# Altium PCB DORY.PcbDoc (part 1 of 2)
Units mil, origin at the board's own origin, x right, y up, seen from the top; angles counter-clockwise.
Board outline 4500 x 4000 mil, 4 copper layers (Signal Layer 1, Signal Layer 2, Signal Layer 3, Signal Layer 4), stack 59.904 mil thick; 158 components, 96 nets, 587 pads, 62 vias.
Unrouted connection lines stored in the file: 389.
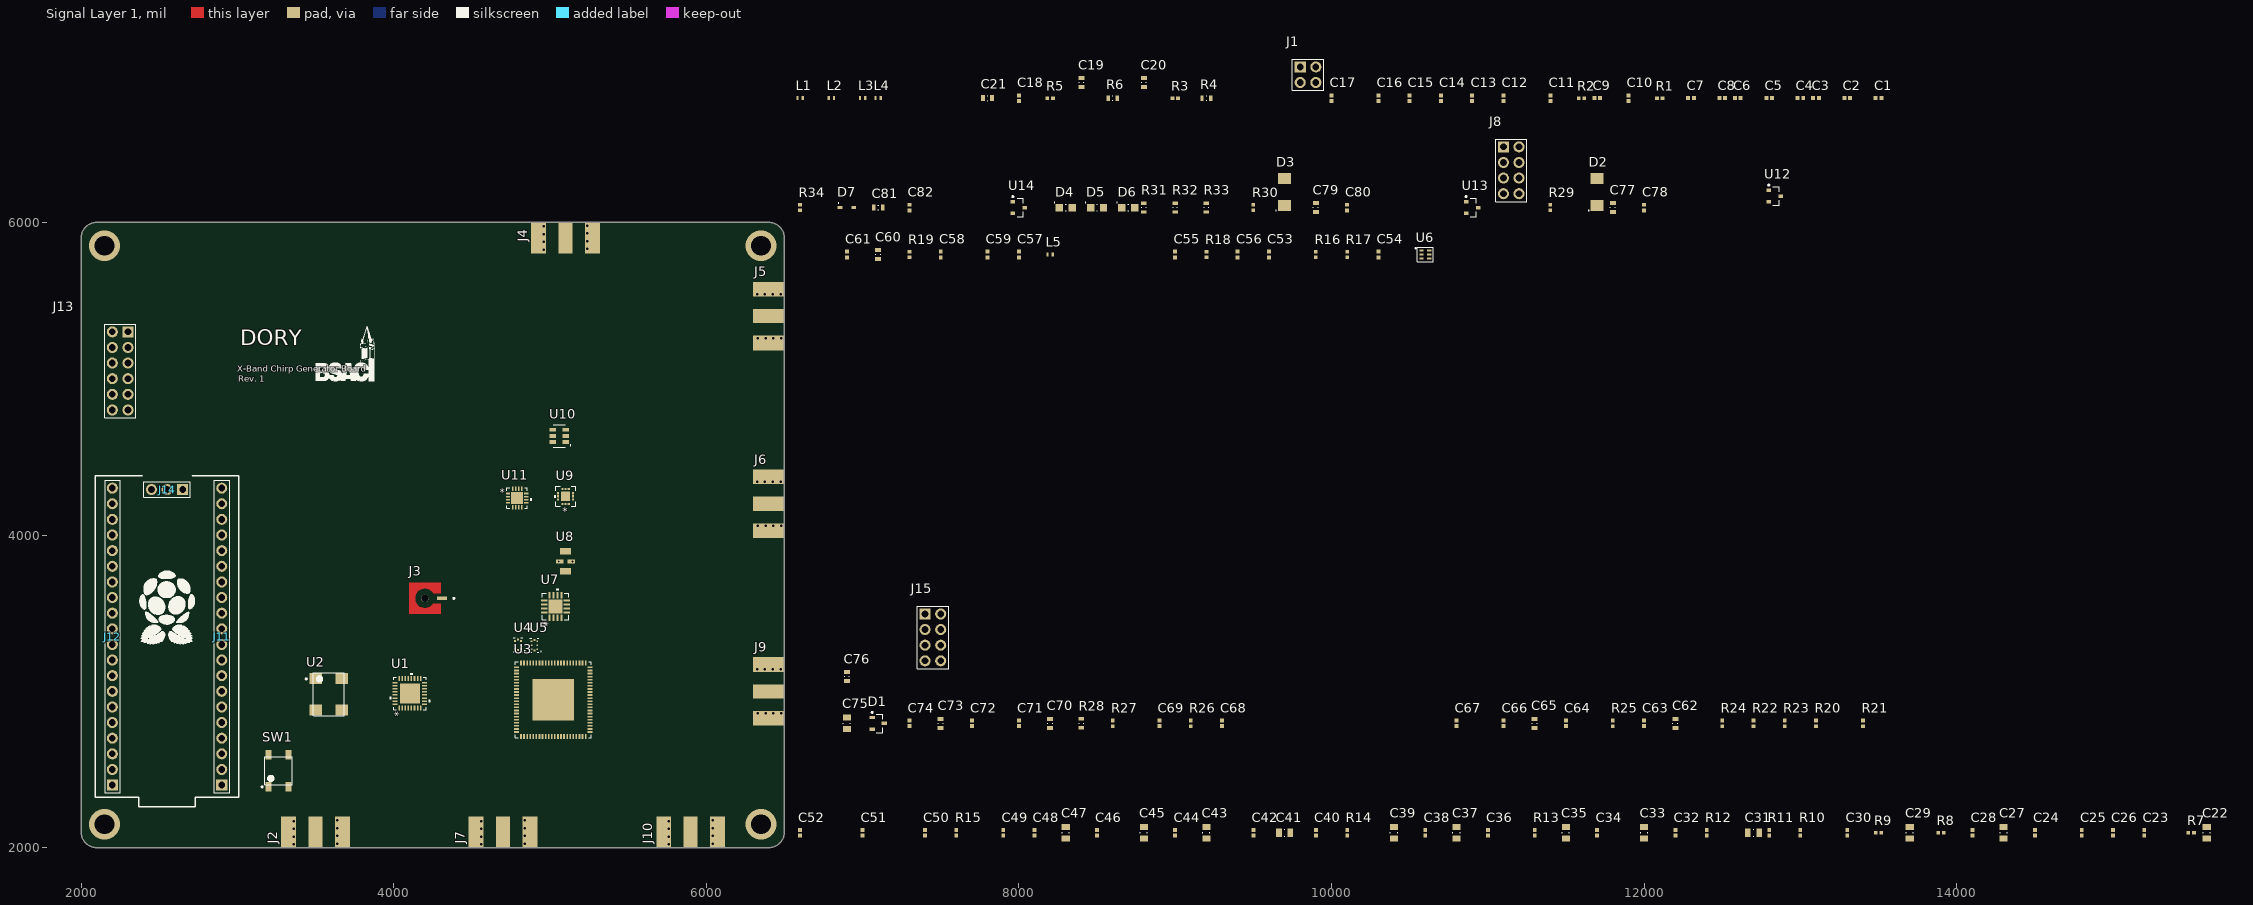
[diagram p0: Signal Layer 1 view]
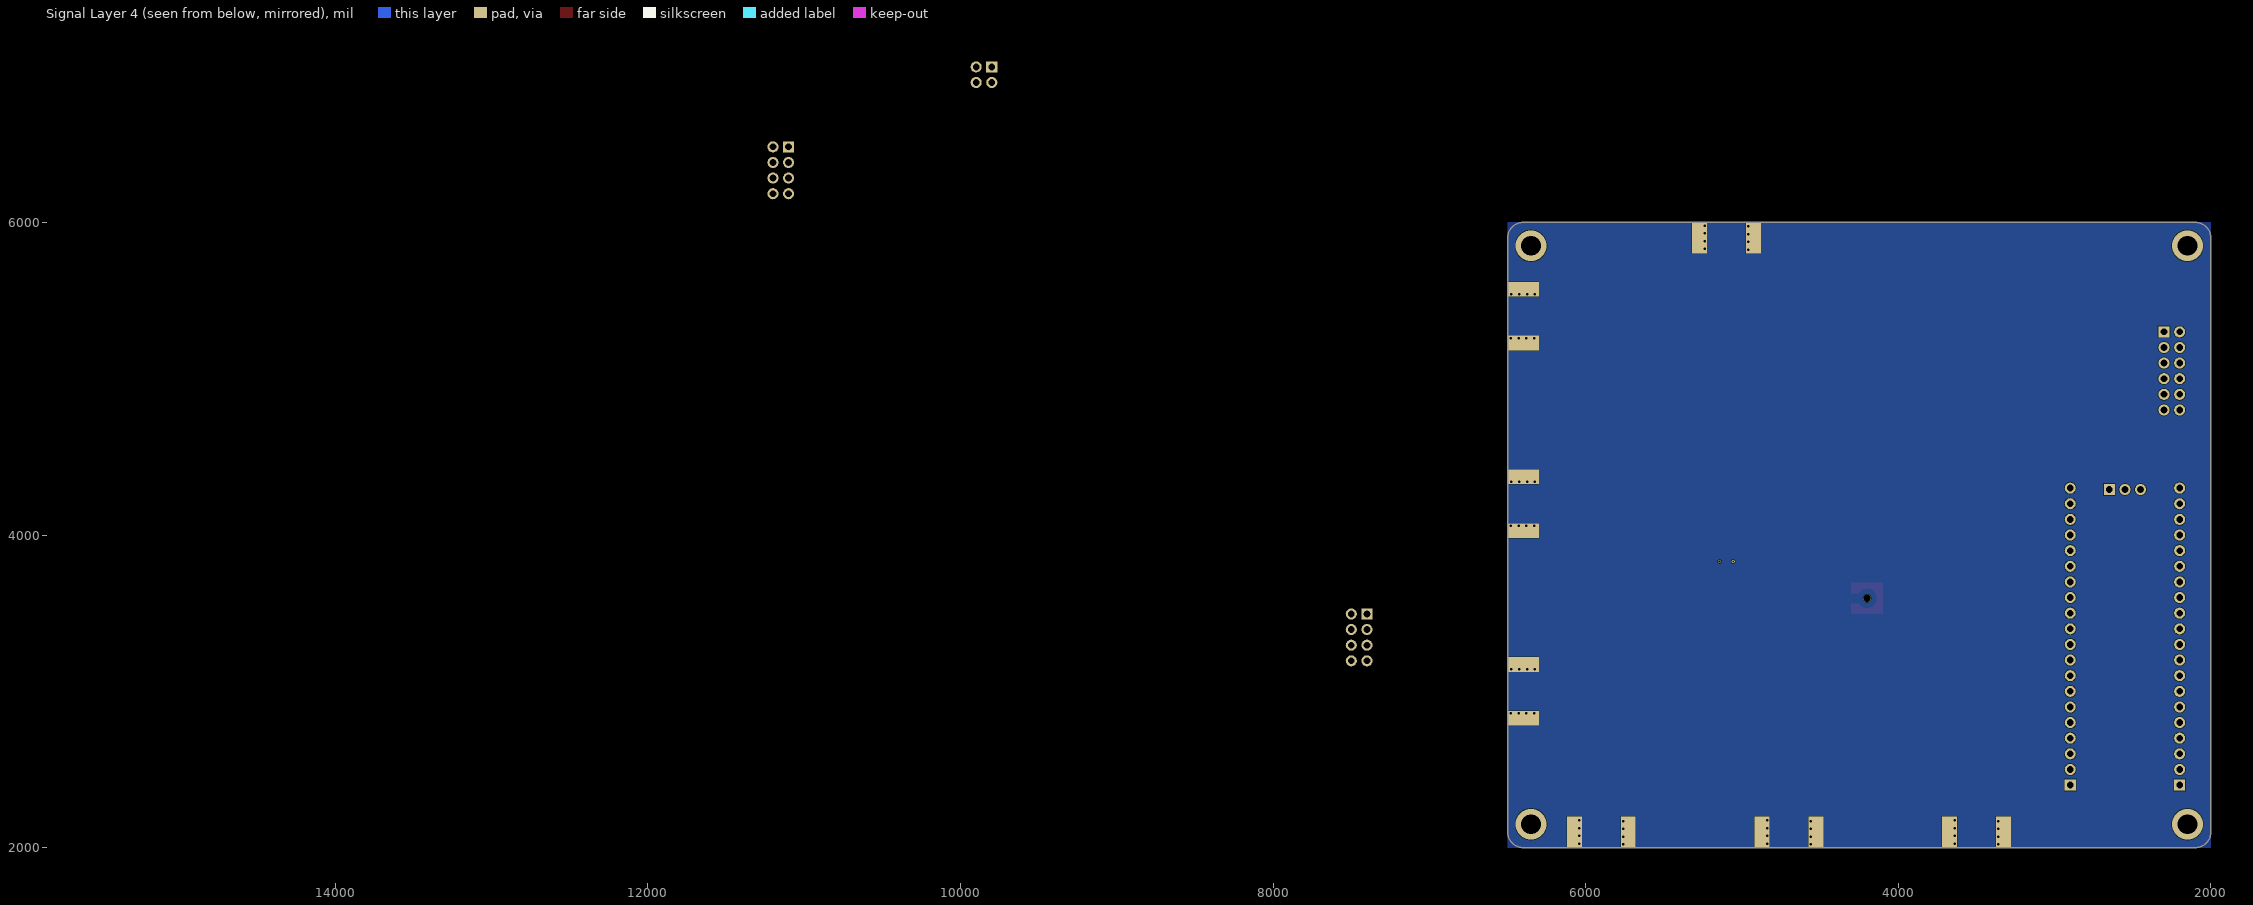
[diagram p1: Signal Layer 4 view, seen from below]
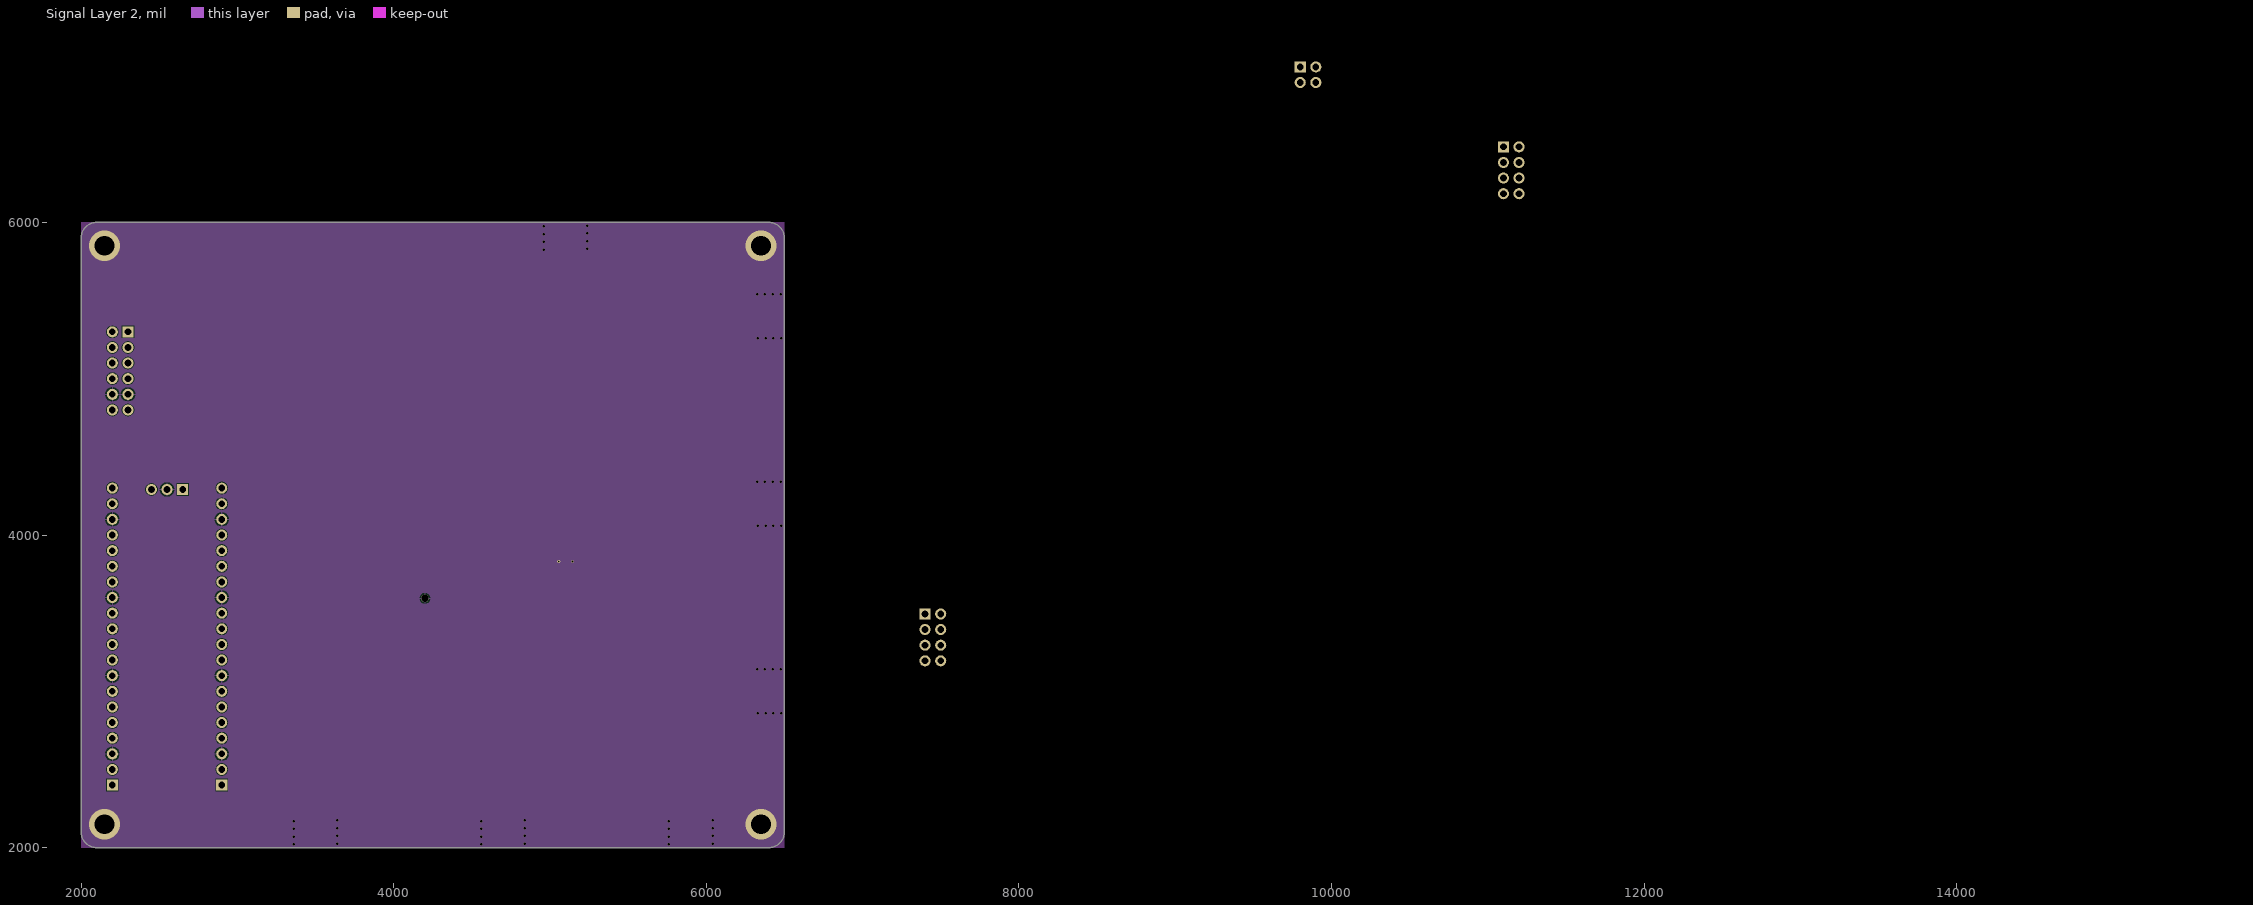
[diagram p2: Signal Layer 2]

## Layer stack, top to bottom
Top Solder: solder mask 0.5, Solder Resist, Dk 3.5
Signal Layer 1: signal copper 1.378
Core 1: core 10, Rogers 4350B 0.010 H1xHH CM 24x18, Dk 3.48
Signal Layer 2: signal copper 1.378
Prepreg 1: prepreg 6.696, Isola FR370HR 1080 18x24 RC71, Dk 3.63
Core 2: core 21, Isola FR370HR 0.021 HHxHH CM 18x24, Dk 4.24
Prepreg 2: prepreg 6.696, Isola FR370HR 1080 18x24 RC71, Dk 3.63
Signal Layer 3: signal copper 1.378
Core 3: core 10, Isola FR370HR 0.010 H1xHH CM 18x24, Dk 4.21
Signal Layer 4: signal copper 1.378
Bottom Solder: solder mask 0.5, Solder Resist, Dk 3.5

## Board outline
2000,2100 2000,5900 cw(c2100,5900) 2100,6000 6400,6000 cw(c6400,5900) 6500,5900 6500,2100 cw(c6400,2100) 6400,2000 2100,2000 cw(c2100,2100)

## Design rules (kind name [scope] priority, off if disabled: settings)
Clearance [All] p1: gap=4 ignorepadtopadclearanceinfootprint=FALSE
DiffPairsRouting [All] p1: maxlimit=10 minlimit=6 mostfreqgap=6 toplayer_minwidth=4 toplayer_maxwidth=50 toplayer_prefwidth=10 midlayer1_minwidth=4 midlayer1_maxwidth=50 midlayer1_prefwidth=10 midlayer2_minwidth=4 midlayer2_maxwidth=50 midlayer2_prefwidth=10 bottomlayer_minwidth=4 bottomlayer_maxwidth=50 bottomlayer_prefwidth=10 maxuncoupledlength=500
HoleSize [All] p1: absolutevalues=TRUE maxlimit=200 minlimit=4 maxpercent=80.000 minpercent=20.000
PolygonConnect [All] p1: thpad.connectstyle=Relief thpad.reliefconductorwidth=10 thpad.reliefentries=4 thpad.polygonreliefangle="90 Angle" thpad.airgapwidth=10 smdpad.connectstyle=Direct smdpad.reliefconductorwidth=10 smdpad.reliefentries=4 smdpad.polygonreliefangle="90 Angle" smdpad.airgapwidth=10 via.connectstyle=Direct via.reliefconductorwidth=10 via.reliefentries=4 via.polygonreliefangle="90 Angle" via.airgapwidth=10
RoutingVias [All] p1: holewidth=15 width=25 viastyle="Through Hole" minholewidth=6 minwidth=11 maxholewidth=28 maxwidth=50
SolderMaskExpansion [All] p1: expansion=4 istentingtop=FALSE
SupplyNets "Schematic Supply Nets_7" [InNet('3V3')] p1: voltage=0.000
SupplyNets "Schematic Supply Nets_6" [InNet('5V')] p2: voltage=0.000
SupplyNets "Schematic Supply Nets_5" [InNet('1V8')] p3: voltage=0.000
SupplyNets "Schematic Supply Nets" [InNet('GND')] p4: voltage=0.000
Width "50 Ohms" [InNetClass('50 Ω')] p1: maxlimit=16.65 minlimit=10 preferedwidth=10 toplayer_minwidth=16.65 toplayer_prefwidth=16.65 minimp=50.000000 maximp=50.000000 favimp=50.000000
Width [All] p2: maxlimit=50 minlimit=4 preferedwidth=10 minimp=50.000000 maximp=50.000000 favimp=50.000000
28 further rules are at their usual default settings.

## Classes and differential pairs
net class "50 Ω": LO_3 NetC54_1 NetJ2_1 NetJ3_1 NetJ4_1 NetJ5_1 NetJ6_1 NetR16_1 NetR16_2 NetR20_1 NetR20_2 NetR21_2 NetR22_2 NetR23_2 RF_3 VCO_REFIN_1
component class VCO: C1 C2 C3 C4 C5 C6 C7 C8 C9 C10 C11 C12 C13 C14 C15 C16 C17 C18 C19 C20 C21 J1 J2 L1 L2 L3 L4 R1 R2 R3 R4 R5 R6 U1 U2
component class POWER: C77 C78 C79 C80 C81 C82 D2 D3 D4 D5 D6 D7 J7 J8 J9 J10 R29 R30 R31 R32 R33 R34 U12 U13 U14
component class MIXER: C53 C54 C55 C56 C57 C58 C59 C60 C61 J3 L5 R16 R17 R18 R19 U6 U7 U8
component class MCU: J11 J12 J13 J14 J15 SW1
component class DOUBLER: C62 C63 C64 C65 C66 C67 C68 C69 C70 C71 C72 C73 C74 C75 C76 D1 J4 J5 J6 R20 R21 R22 R23 R24 R25 R26 R27 R28 U9 U10 U11
component class DDS: C22 C23 C24 C25 C26 C27 C28 C29 C30 C31 C32 C33 C34 C35 C36 C37 C38 C39 C40 C41 C42 C43 C44 C45 C46 C47 C48 C49 C50 C51 C52 R7 R8 R9 R10 R11 R12 R13 R14 R15 U3 U4 U5
differential pair VCO_RFOUTB: +VCO_RFOUTB_P -VCO_RFOUTB_N
differential pair VCO_RFOUTA: +VCO_RFOUTA_P -VCO_RFOUTA_N
differential pair DDS_REFCLK_2: +DDS_REFCLK_2_P -DDS_REFCLK_2_N
differential pair DDS_OUT: +DDS_OUT_P -DDS_OUT_N
differential pair DDS_AOUT_2: +DDS_AOUT_2_P -DDS_AOUT_2_N

## Components (designator, comment, footprint, x,y, rotation, side; value= is the part's Value field where it differs from the comment)
C1 "100 nF" CAP_0402 13500,6795 r0 top
C2 "10 pF" CAP_0402 13300,6795 r0 top
C3 "100 nF" CAP_0402 13100,6795 r0 top
C4 "10 pF" CAP_0402 13000,6795 r0 top
C5 "100 nF" CAP_0402 12800,6795 r0 top
C6 "10 pF" CAP_0402 12600,6795 r0 top
C7 "1 nF" CAP_0402 12300,6795 r0 top
C8 "100 nF" CAP_0402 12500,6795 r0 top
C9 "10 pF" CAP_0402 11700,6795 r0 top
C10 "100 nF" CAP_0402 11900,6795 r90 top
C11 "10 pF" CAP_0402 11400,6795 r90 top
C12 "100 nF" CAP_0402 11100,6795 r90 top
C13 "10 pF" CAP_0402 10900,6795 r90 top
C14 "100 nF" CAP_0402 10700,6795 r90 top
C15 "10 pF" CAP_0402 10500,6795 r90 top
C16 "100 nF" CAP_0402 10300,6795 r90 top
C17 "10 pF" CAP_0402 10000,6795 r90 top
C18 "100 nF" CAP_0402 8000,6795 r90 top
C19 "3.01 nF" CAP_0603 8400,6895 r90 top
C20 "218 pF" CAP_0603 8800,6895 r90 top
C21 "133 nF" CAP_0603 7800,6795 r0 top
C22 "10 uF" CAP_0805 15600,2095 r90 top
C23 "100 nF" CAP_0402 15200,2095 r90 top
C24 "100 nF" CAP_0402 14500,2095 r90 top
C25 "1 uF" CAP_0402 14800,2095 r90 top
C26 "1 uF" CAP_0402 15000,2095 r90 top
C27 "10 uF" CAP_0805 14300,2095 r90 top
C28 "100 nF" CAP_0402 14100,2095 r90 top
C29 "10 uF" CAP_0805 13700,2095 r90 top
C30 "100 nF" CAP_0402 13300,2095 r90 top
C31 "10 uF" CAP_0805 12700,2095 r0 top
C32 "100 nF" CAP_0402 12200,2095 r90 top
C33 "10 uF" CAP_0805 12000,2095 r90 top
C34 "100 nF" CAP_0402 11700,2095 r90 top
C35 "10 uF" CAP_0805 11500,2095 r90 top
C36 "100 nF" CAP_0402 11000,2095 r90 top
C37 "10 uF" CAP_0805 10800,2095 r90 top
C38 "100 nF" CAP_0402 10600,2095 r90 top
C39 "10 uF" CAP_0805 10400,2095 r90 top
C40 "100 nF" CAP_0402 9900,2095 r90 top
C41 "10 uF" CAP_0805 9700,2095 r0 top
C42 "100 nF" CAP_0402 9500,2095 r90 top
C43 "10 uF" CAP_0805 9200,2095 r90 top
C44 "100 nF" CAP_0402 9000,2095 r90 top
C45 "10 uF" CAP_0805 8800,2095 r90 top
C46 "100 nF" CAP_0402 8500,2095 r90 top
C47 "10 uF" CAP_0805 8300,2095 r90 top
C48 "100 nF" CAP_0402 8100,2095 r90 top
C49 "1 nF" CAP_0402 7900,2095 r90 top
C50 "1 nF" CAP_0402 7400,2095 r90 top
C51 "1 nF" CAP_0402 7000,2095 r90 top
C52 "1 nF" CAP_0402 6600,2095 r90 top
C53 "1 nF" CAP_0402 9600,5795 r90 top
C54 "100 pF" CAP_0402 10300,5795 r90 top
C55 "1 nF" CAP_0402 9000,5795 r90 top
C56 "0.3 pF" CAP_0402 9400,5795 r90 top
C57 "1 nF" CAP_0402 8000,5795 r90 top
C58 "1 nF" CAP_0402 7500,5795 r90 top
C59 "0.2 pF" CAP_0402 7800,5795 r90 top
C60 "1 uF" CAP_0603 7100,5795 r90 top
C61 "10 nF" CAP_0402 6900,5795 r90 top
C62 "2.2 uF" CAP_0603 12200,2795 r90 top
C63 "1 nF" CAP_0402 12000,2795 r90 top
C64 "100 pF" CAP_0402 11500,2795 r90 top
C65 "2.2 uF" CAP_0603 11300,2795 r90 top
C66 "1 nF" CAP_0402 11100,2795 r90 top
C67 "100 pF" CAP_0402 10800,2795 r90 top
C68 "15 nF" CAP_0402 9300,2795 r90 top
C69 "100 nF" CAP_0402 8900,2795 r90 top
C70 "4.7 uF" CAP_0603 8200,2795 r90 top
C71 "10 nF" CAP_0402 8000,2795 r90 top
C72 "100 nF" CAP_0402 7700,2795 r90 top
C73 "4.7 uF" CAP_0603 7500,2795 r90 top
C74 "10 nF" CAP_0402 7300,2795 r90 top
C75 "10 uF" CAP_0805 6900,2795 r90 top
C76 "1 uF" CAP_0603 6900,3095 r90 top
C77 "10 uF" CAP_0603 11800,6095 r90 top
C78 "100 nF" CAP_0402 12000,6095 r90 top
C79 "10 uF" CAP_0603 9900,6095 r90 top
C80 "100 nF" CAP_0402 10100,6095 r90 top
C81 "10 uF" CAP_0603 7100,6095 r0 top
C82 "100 nF" CAP_0402 7300,6095 r90 top
D1 "BAT54SLT1G" BAT54SL 7100,2795 r0 top
D2 "SMAJ6.0A" SMAJ 11700,6195 r90 top
D3 "SMAJ5.0A" SMAJ 9700,6195 r90 top
D4 "CTL0805FRD1T" CTL0805FRD1T 8300,6095 r0 top
D5 "CTL0805FRD1T" CTL0805FRD1T 8500,6095 r0 top
D6 "CTL0805FRD1T" CTL0805FRD1T 8700,6095 r0 top
D7 "CDSOD323-T03" CDSOD323 6900,6095 r0 top
J1 "Header" CONN_2x2_2.54mm_PinHeader_Vertical 9800,6995 r0 top
J2 "CONN_RF_SMA" 142-0701-801 3500,2000 r270 top
J3 "CONN_RF_SMP" 853050232 4200,3595 r90 top
J4 "CONN_RF_SMA" 142-0701-801 5100,6000 r90 top
J5 "CONN_RF_SMA" 142-0701-801 6500,5400 r0 top
J6 "CONN_RF_SMA" 142-0701-801 6500,4200 r0 top
J7 "CONN_RF_SMA" 142-0701-801 4700,2000 r270 top
J8 "Header" CONN_2x4_2.54mm_PinHeader_Vertical 11100,6483.51 r0 top
J9 "CONN_RF_SMA" 142-0701-801 6500,3000 r0 top
J10 "CONN_RF_SMA" 142-0701-801 5900,2000 r270 top
J11 "Header" CONN_1x20_2.54mm_PinSocket_Vertical 2900,2400 r180 top
J12 "Header" CONN_1x20_2.54mm_PinSocket_Vertical 2200,2400 r180 top
J13 "Header" CONN_2x6_2.54mm_PinHeader_Horizontal 2300,5300 r0 top
J14 "Header" CONN_1x3_2.54mm_PinSocket_Vertical 2650,4290.94 r270 top
J15 "Header" CONN_2x4_2.54mm_PinHeader_Vertical 7400,3495 r0 top
L1 "3.9 nH" IND_0402 6600,6795 r0 top
L2 "3.9 nH" IND_0402 6800,6795 r0 top
L3 "3.9 nH" IND_0402 7000,6795 r0 top
L4 "3.9 nH" IND_0402 7100,6795 r0 top
L5 "1 nH" IND_0402 8200,5795 r0 top
R1 "10 kΩ" RES_0402 12100,6795 r0 top
R2 "5.1 kΩ" RES_0402 11600,6795 r0 top
R3 "0 Ω" RES_0402 9000,6795 r0 top
R4 "2.38 kΩ" RES_0603 9200,6795 r0 top
R5 "0 Ω" RES_0402 8200,6795 r0 top
R6 "176 Ω" RES_0603 8600,6795 r0 top
R7 "3.3 kΩ" RES_0402 15500,2095 r0 top
R8 "3.3 kΩ" RES_0402 13900,2095 r0 top
R9 "3.3 kΩ" RES_0402 13500,2095 r0 top
R10 "3.3 kΩ" RES_0402 13000,2095 r90 top
R11 "3.3 kΩ" RES_0402 12800,2095 r90 top
R12 "3.3 kΩ" RES_0402 12400,2095 r90 top
R13 "3.3 kΩ" RES_0402 11300,2095 r90 top
R14 "50 Ω" RES_0402 10100,2095 r90 top
R15 "100 Ω" RES_0402 7600,2095 r90 top
R16 "0 Ω" RES_0402 9900,5795 r90 top
R17 "0 Ω" RES_0402 10100,5795 r90 top
R18 "NP" RES_0402 9200,5795 r90 top
R19 "2.61 kΩ" RES_0402 7300,5795 r90 top
R20 "0 Ω" RES_0402 13100,2795 r90 top
R21 "0 Ω" RES_0402 13400,2795 r90 top
R22 "0 Ω" RES_0402 12700,2795 r90 top
R23 "0 Ω" RES_0402 12900,2795 r90 top
R24 "NP" RES_0402 12500,2795 r90 top
R25 "NP" RES_0402 11800,2795 r90 top
R26 "10 kΩ" RES_0402 9100,2795 r90 top
R27 "10 kΩ" RES_0402 8600,2795 r90 top
R28 "347 Ω" RES_0603 8400,2795 r90 top
R29 "470 Ω" RES_0402 11400,6095 r90 top
R30 "470 Ω" RES_0402 9500,6095 r90 top
R31 "2 kΩ" RES_0603 8800,6095 r90 top value=2kΩ
R32 "1 kΩ" RES_0603 9000,6095 r90 top value=1kΩ
R33 "178 Ω" RES_0603 9200,6095 r90 top value=178Ω
R34 "470 Ω" RES_0402 6600,6095 r90 top
SW1 "Y97KT23B2NAFP" PTS647 3262.99,2491.65 r90 top
U1 "ADF4350BCPZ" CP_32_2_ADI 4103.8,2986.5 r90 top
U2 "CWX813-050.0M" CWX8XX 3584.44,2980.86 r270 top
U3 "AD9914BCPZ" CP_88_5_ADI 5021.31,2946.28 r270 top
U4 "LFCG-1525+" PL-429 4795.17,3296.97 r180 top
U5 "LFCG-1525+" PL-429 4900,3295 r180 top
U6 "BAL-UWB-01E3" ST_CSP6_82x65P2x3_180x125x45 10600,5795 r0 top
U7 "LTC5576IUF#PBF" QFN-16_UF_LIT 5034.72,3543.01 r90 top
U8 "BFCN-4440+" FV1206 5100,3831 r270 top
U9 "HMC573LC3B" HE_12_1_ADI 5100,4247.36 r180 top
U10 "HFCN-7150+" FV1206-1 5059.5,4634 r180 top
U11 "HMC981LP3E" QFN16_3X3_ADI 4790.16,4236 r0 top
U12 "SI2301CDS" SI2301CDS 12836.49,6168.72 r0 top
U13 "SI2301CDS" SI2301CDS 10900,6095 r0 top
U14 "SI2301CDS" SI2301CDS 8000,6095 r0 top

## Footprints (in the part's own frame and the unit in brackets; to place one, negate y for a bottom-side part, rotate by r counter-clockwise, add the part's x,y. Pads: shape width x height; smd on the part's side, far side on the other; paste and mask are expansions set on the pad)
142-0701-801 [mil] "Connector RF SMA Edge Launch"
  rect 200x90 smd: 1(-100,0)
  rect 200x95 smd: 2(-100,172.5) 2(-100,-172.5)
  rect 200x95 smd far side: 2(-100,172.5) 2(-100,-172.5)
  body extent -187,-188 375,188, height 173
853050232 [mil]
  rect 24x65 smd paste-32.5 mask-32.5: 1(0,-109.5)
  round 47 hole 47 unplated paste-99999 mask+0: 2(0,0)
  Signal Layer 1 region: -33.5,-100 -100,-100 -100,100 100,100 100,-100 33.5,-100 33,-54 35,-52.38 44.55,-44.55 52.38,-35 58.2,-24.11 61.79,-12.29 63,0 61.79,12.29 58.2,24.11 52.38,35 44.55,44.55 35,52.38 24.11,58.2 12.29,61.79 0,63 -12.29,61.79 -24.11,58.2 -35,52.38 -44.55,44.55 -52.38,35 -58.2,24.11 -61.79,12.29 -63,0 -61.79,-12.29 -58.2,-24.11 -52.38,-35 -44.55,-44.55 -35,-52.38 -33,-54
  silkscreen extent -2,-186 2,-183, body extent -98,-137 98,98, height 161
BAT54SL [mm] "SOT23, 3-Leads, Body 2.92x2.37mm, Pitch 0.95mm, IPC Medium Density"
  rect 0.95x0.56 smd: 1(-0.975,0.95) 2(-0.975,-0.95) 3(0.975,0)
  silkscreen extent -1.1,-1.5 0.7,1.9, body extent -1.32,-1.52 1.32,1.52, height 1.11
CAP_0402 [mm] "Chip Capacitor, 2-Leads, Body 1.00x0.50mm, IPC Medium Density"
  rect 0.64x0.64 smd: 1(-0.46,0) 2(0.46,0)
  body extent -0.55,-0.3 0.55,0.3, height 0.6
CAP_0603 [mm] "Chip Capacitor, 2-Leads, Body 1.55x0.85mm, IPC Medium Density"
  rect 0.62x0.98 smd: 1(-0.73,0) 2(0.73,0)
  silkscreen extent -0.05,-0.39 0.05,0.39, body extent -0.8,-0.45 0.8,0.45, height 0.5
CAP_0805 [mm] "Chip Capacitor, 2-Leads, Body 2.00x1.25mm, IPC Medium Density"
  rect 0.95x1.35 smd: 1(-0.925,0) 2(0.925,0)
  silkscreen extent -0.05,-0.58 0.05,0.58, body extent -1.02,-0.65 1.02,0.65, height 0.5
CDSOD323 [mm] "TVS Diode Surface Mount SOD-323"
  rect 0.8x0.5 smd: 1(-1.1,0) 2(1.1,0)
  silkscreen extent -1.4,0.67 -1.3,0.77, body extent -1.35,-0.72 1.35,0.72, height 1.15
CONN_1x3_2.54mm_PinSocket_Vertical [mm] "1x3 2.54mm Vertical Pin Socket"
  rect 1.8x1.8 hole 1.1: 1(0,0)
  round 1.8 hole 1.1: 2(0,-2.54) 3(0,-5.08)
  silkscreen extent -1.27,-6.35 1.27,1.27, body extent -1.3,-6.35 1.24,1.27, height 8.5
CONN_1x20_2.54mm_PinSocket_Vertical [mm] "1x20 2.54mm Vertical Pin Socket"
  rect 1.8x1.8 hole 1.1: 1(0,0)
  round 1.8 hole 1.1: 2(0,-2.54) 3(0,-5.08) 4(0,-7.62) 5(0,-10.16) 6(0,-12.7) 7(0,-15.24) 8(0,-17.78) 9(0,-20.32) 10(0,-22.86) 11(0,-25.4) 12(0,-27.94) 13(0,-30.48) 14(0,-33.02) 15(0,-35.56) 16(0,-38.1) 17(0,-40.64) 18(0,-43.18) 19(0,-45.72) 20(0,-48.26)
  silkscreen extent -1.27,-49.53 1.27,1.27, body extent -1.27,-49.53 1.27,1.27, height 8.5
CONN_2x2_2.54mm_PinHeader_Vertical [mm] "2x2 2.54mm Vertical Pin Header"
  rect 1.8x1.8 hole 1.1: 1(0,0)
  round 1.8 hole 1.1: 2(0,-2.54) 3(2.54,0) 4(2.54,-2.54)
  silkscreen extent -1.27,-3.81 3.81,1.27, body extent -1.27,-3.81 3.81,1.27, height 9.5
CONN_2x4_2.54mm_PinHeader_Vertical [mm] "2x4 2.54mm Vertical Pin Header"
  rect 1.8x1.8 hole 1.1: 1(0,0)
  round 1.8 hole 1.1: 2(0,-2.54) 3(0,-5.08) 4(0,-7.62) 5(2.54,0) 6(2.54,-2.54) 7(2.54,-5.08) 8(2.54,-7.62)
  silkscreen extent -1.27,-8.89 3.81,1.27, body extent -1.27,-8.89 3.81,1.27, height 9.5
CONN_2x6_2.54mm_PinHeader_Horizontal [mm] "2x6 2.54mm Horizontal Pin Header"
  rect 1.8x1.8 hole 1.1: 1(0,0)
  round 1.8 hole 1.1: 2(0,-2.54) 3(0,-5.08) 4(0,-7.62) 5(0,-10.16) 6(0,-12.7) 7(-2.54,0) 8(-2.54,-2.54) 9(-2.54,-5.08) 10(-2.54,-7.62) 11(-2.54,-10.16) 12(-2.54,-12.7)
  silkscreen extent -3.81,-13.97 1.27,1.27, body extent -12.45,-13.97 0.38,1.27, height 5.08
CP_32_2_ADI [mil]
  rect 32x10 smd paste+0 mask+0: 1(-94.5,68.9) 2(-94.5,49.21) 3(-94.5,29.53) 4(-94.5,9.84) 5(-94.5,-9.84) 6(-94.5,-29.53) 7(-94.5,-49.21) 8(-94.5,-68.9) 17(94.5,-68.9) 18(94.5,-49.21) 19(94.5,-29.53) 20(94.5,-9.84) 21(94.5,9.84) 22(94.5,29.53) 23(94.5,49.21) 24(94.5,68.9)
  rect 10x32 smd paste+0 mask+0: 9(-68.9,-94.5) 10(-49.21,-94.5) 11(-29.53,-94.5) 12(-9.84,-94.5) 13(9.84,-94.5) 14(29.53,-94.5) 15(49.21,-94.5) 16(68.9,-94.5) 25(68.9,94.5) 26(49.21,94.5) 27(29.53,94.5) 28(9.84,94.5) 29(-9.84,94.5) 30(-29.53,94.5) 31(-49.21,94.5) 32(-68.9,94.5)
  rect 128x128 smd paste-64 mask+0: 33(0,0)
  silkscreen extent -104,-130 130,130, body extent -99,-99 99,99, height 39
CP_88_5_ADI [mm]
  rect 0.275x0.805 smd paste+0 mask+0: 1(5.25,5.952) 2(4.75,5.952) 3(4.25,5.952) 4(3.75,5.952) 5(3.25,5.952) 6(2.75,5.952) 7(2.25,5.952) 8(1.75,5.952) 9(1.25,5.952) 10(0.75,5.952) 11(0.25,5.952) 12(-0.25,5.952) 13(-0.75,5.952) 14(-1.25,5.952) 15(-1.75,5.952) 16(-2.25,5.952) 17(-2.75,5.952) 18(-3.25,5.952) 19(-3.75,5.952) 20(-4.25,5.952) 21(-4.75,5.952) 22(-5.25,5.952) 45(-5.25,-5.952) 46(-4.75,-5.952) 47(-4.25,-5.952) 48(-3.75,-5.952) 49(-3.25,-5.952) 50(-2.75,-5.952) 51(-2.25,-5.952) 52(-1.75,-5.952) 53(-1.25,-5.952) 54(-0.75,-5.952) 55(-0.25,-5.952) 56(0.25,-5.952) 57(0.75,-5.952) 58(1.25,-5.952) 59(1.75,-5.952) 60(2.25,-5.952) 61(2.75,-5.952) 62(3.25,-5.952) 63(3.75,-5.952) 64(4.25,-5.952) 65(4.75,-5.952) 66(5.25,-5.952)
  rect 0.805x0.275 smd paste+0 mask+0: 23(-5.952,5.25) 24(-5.952,4.75) 25(-5.952,4.25) 26(-5.952,3.75) 27(-5.952,3.25) 28(-5.952,2.75) 29(-5.952,2.25) 30(-5.952,1.75) 31(-5.952,1.25) 32(-5.952,0.75) 33(-5.952,0.25) 34(-5.952,-0.25) 35(-5.952,-0.75) 36(-5.952,-1.25) 37(-5.952,-1.75) 38(-5.952,-2.25) 39(-5.952,-2.75) 40(-5.952,-3.25) 41(-5.952,-3.75) 42(-5.952,-4.25) 43(-5.952,-4.75) 44(-5.952,-5.25) 67(5.952,-5.25) 68(5.952,-4.75) 69(5.952,-4.25) 70(5.952,-3.75) 71(5.952,-3.25) 72(5.952,-2.75) 73(5.952,-2.25) 74(5.952,-1.75) 75(5.952,-1.25) 76(5.952,-0.75) 77(5.952,-0.25) 78(5.952,0.25) 79(5.952,0.75) 80(5.952,1.25) 81(5.952,1.75) 82(5.952,2.25) 83(5.952,2.75) 84(5.952,3.25) 85(5.952,3.75) 86(5.952,4.25) 87(5.952,4.75) 88(5.952,5.25)
  rect 6.7x6.7 smd paste+0 mask+0: HTAB(0,0)
  silkscreen extent -6.18,-6.18 6.18,6.18, body extent -6.05,-6.05 6.05,6.05, height 0.9
CTL0805FRD1T [mm] "Chip Diode, 2-Leads, Body 2.00x1.25mm, IPC Medium Density"
  rect 1.2x1.2 smd: 1(-1.05,0) 2(1.05,0)
  silkscreen extent -1.91,-0.5 0.05,0.86, body extent -1.05,-0.67 1.05,0.67, height 0.9
CWX8XX [mm] "5.0x7.0mm Surface Mount CMOS Clock Oscillator"
  rect 1.8x2 smd: 1(-2.54,-2.1) 2(2.54,-2.1) 3(2.54,2.1) 4(-2.54,2.1)
  silkscreen extent -3.5,-3.77 3.5,2.5, body extent -3.5,-2.5 3.5,2.5, height 1.3
FV1206 [mil]
  rect 41x71 smd: 1(-64,0) 3(64,0)
  rect 24x49 smd: 2(0,-36.5) 4(0,36.5)
  body extent -63,-31 63,31, height 37
FV1206-1 [mil]
  rect 42x24 smd: 1(-40.5,39) 2(-40.5,0) 3(-40.5,-39) 4(40.5,-39) 5(40.5,0) 6(40.5,39)
  silkscreen extent -74,-71 40,71, body extent -34,-66 34,66, height 42
HE_12_1_ADI [mm]
  rect 0.36x0.32 smd paste+0 mask+0: 1(0,1.21) 2(-0.5,1.21) 6(-0.5,-1.21) 7(0,-1.21) 8(0.5,-1.21) 12(0.5,1.21)
  rect 0.32x0.36 smd paste+0 mask+0: 3(-1.21,0.5) 4(-1.21,0) 5(-1.21,-0.5) 9(1.21,-0.5) 10(1.21,0) 11(1.21,0.5)
  rect 1.5x1.5 smd paste+0 mask+0: 13(0,0)
  silkscreen extent -1.63,-1.63 1.88,1.63, body extent -1.55,-1.55 1.55,1.55, height 0.92
IND_0402 [mm] "Chip Inductor, 2-Leads, Body 1.00x0.50mm, IPC Medium Density"
  rect 0.35x0.65 smd: 1(-0.425,0) 2(0.425,0)
  body extent -0.55,-0.3 0.55,0.3, height 0.6
PL-429 [mm]
  rect 0.3x0.3 smd: 1(-0.48,0.65) 2(-0.48,0) 3(-0.48,-0.65) 4(0,-0.85) 5(0.48,-0.65) 6(0.48,0) 7(0.48,0.65) 8(0,0.85)
  silkscreen extent -1.15,-1.13 0.75,1.13, body extent -0.62,-1 0.62,1, height 0.94
PTS647 [mm] "4.5x4.5mm SMT Tactile Switch"
  rect 1.55x1 smd: 1(-2.625,1.6) 2(2.625,1.6) 3(2.625,-1.6) 4(-2.625,-1.6)
  silkscreen extent -2.75,-2.25 2.25,2.77, body extent -2.25,-2.25 2.25,2.25, height 3.8
QFN16_3X3_ADI [mil]
  rect 28x10 smd paste+0 mask+0: 1(-59,29.53) 2(-59,9.84) 3(-59,-9.84) 4(-59,-29.53) 9(59,-29.53) 10(59,-9.84) 11(59,9.84) 12(59,29.53)
  rect 10x28 smd paste+0 mask+0: 5(-29.53,-59) 6(-9.84,-59) 7(9.84,-59) 8(29.53,-59) 13(29.53,59) 14(9.84,59) 15(-9.84,59) 16(-29.53,59)
  rect 77x77 smd paste+0 mask+0: 17(0,0)
  silkscreen extent -66,-66 93,66, body extent -61,-61 61,61, height 39
QFN-16_UF_LIT [mm]
  rect 1.055x0.299 smd paste+0 mask+0: 1(-1.827,0.975) 2(-1.827,0.325) 3(-1.827,-0.325) 4(-1.827,-0.975) 9(1.827,-0.975) 10(1.827,-0.325) 11(1.827,0.325) 12(1.827,0.975)
  rect 0.299x1.055 smd paste+0 mask+0: 5(-0.975,-1.827) 6(-0.325,-1.827) 7(0.325,-1.827) 8(0.975,-1.827) 13(0.975,1.827) 14(0.325,1.827) 15(-0.325,1.827) 16(-0.975,1.827)
  rect 2.25x2.25 smd paste+0 mask+0: 17(0,0)
  silkscreen extent -2.18,-2.18 2.86,2.18, body extent -2.05,-2.05 2.05,2.05, height 0.8
RES_0402 [mm] "Chip Resistor, 2-Leads, Body 1.00x0.50mm, IPC Medium Density"
  rect 0.6x0.6 smd: 1(-0.45,0) 2(0.45,0)
  body extent -0.55,-0.3 0.55,0.3, height 0.6
RES_0603 [mm] "Chip Resistor, 2-Leads, Body 1.55x0.85mm, IPC Medium Density"
  rect 0.55x0.9 smd: 1(-0.725,0) 2(0.725,0)
  silkscreen extent -0.05,-0.35 0.05,0.35, body extent -0.8,-0.45 0.8,0.45, height 0.5
SI2301CDS [mm] "SOT23, 3-Leads, Body 2.92x2.37mm, Pitch 0.95mm, IPC Medium Density"
  rect 0.724x0.559 smd: 1(-0.984,0.95) 2(-0.984,-0.95) 3(0.984,0)
  silkscreen extent -1.11,-1.5 0.7,1.9, body extent -1.32,-1.52 1.32,1.52, height 1.12
SMAJ [mm] "TVS Diode Surface Mount DO-214AC"
  rect 1.8x2.1 smd: 1(-2.2,0) 2(2.2,0)
  silkscreen extent -3.05,1.33 -2.95,1.42, body extent -2.64,-1.4 2.64,1.4, height 2.34
ST_CSP6_82x65P2x3_180x125x45 [mm]
  rect 0.7x0.35 smd mask+0.05: A1(-0.625,0.65) A2(-0.625,0) A3(-0.625,-0.65) B1(0.625,0.65) B2(0.625,0) B3(0.625,-0.65)
  silkscreen extent -1.64,-1.2 1.33,1.2, body extent -0.63,-0.9 0.63,0.9, height 0.45

## Part data
C1 C2 C3 C4 C5 C6 C7 C8 C9 C10 C11 C12 C13 C14 C15 C16 C17 C18 C23 C24 C25 C26 C28 C30 C32 C34 C36 C38 C40 C42 C44 C46 C48 C49 C50 C51 C52 C53 C54 C55 C56 C57 C58 C59 C61 C63 C64 C66 C67 C68 C69 C71 C72 C74 C78 C80 C82: library part CAP, "Capacitor SMD Generic", Package Size=0402
C19 C20 C21 C60 C62 C65 C70 C73 C76 C77 C79 C81: library part CAP, "Capacitor SMD Generic", Package Size=0603
C22 C27 C29 C31 C33 C35 C37 C39 C41 C43 C45 C47 C75: library part CAP, "Capacitor SMD Generic", Package Size=0805
D1: "Diode Array 1 Pair Series Connection 30 V 200mA (DC) Surface Mount TO-236-3, SC-59, SOT-23-3", Manufacturer=onsemi, Manufacturer Part Number=BAT54SLT1G
D2: "TVS Diode 6VWM 10.3VC Surface Mount DO-214AC", Breakdown Voltage="6.67 V", Manufacturer="Littelfuse Inc.", Maximum Clamping Voltage="10.3 V", Reverse Standoff Voltage="6 V", Manufacturer Part Number=SMAJ6.0A
D3: "TVS Diode 5VWM 9.2VC Surface Mount DO-214AC", Breakdown Voltage="6.40 V", Manufacturer="Littelfuse Inc.", Maximum Clamping Voltage="9.2 V", Reverse Standoff Voltage="5 V", Manufacturer Part Number=SMAJ5.0A
D4 D5 D6: "Chip Type LED, 0805, Flat Lens, Red", Current="20 mA", Forward Voltage="1.5 V", Manufacturer=Venkel, Manufacturer Part Number=CTL0805FRD1T-CT, Package Size=0805
D7: "TVS Diode 3.3VWM 19VC Surface Mount SOD323", Breakdown Voltage="4 V", Manufacturer="Bourns Inc.", Maximum Clamping Voltage="19 V", Reverse Standoff Voltage="3.3 V", Manufacturer Part Number=CDSOD323-T03
J1: library part CONN_2x2_2.54mm_PinHeader_Vertical, "Pin Header, Board-to-Board, 2.54 mm, 2 Rows, 4 Contacts, Through Hole, TSW Series", Color=Black, Manufacturer=Samtec, Manufacturer Lifecycle Status=PRODUCTION, Manufacturer Part Number=TSW-102-07-F-D, Max Current Rating=7.6A, Max Operating Temperature=125°C, Max Voltage Rating (AC)=550V, Min Operating Temperature=-55°C, Supplier Part Number=SAM10843-ND, Category="Headers and Wire Housings", ComponentLink1Description=https://datasheet.octopart.com:443/TSW-102-07-F-D-Samtec-datasheet-97325576.pdf?src-supplier=Sager+Electronics, ComponentLink1URL=https://datasheet.octopart.com:443/TSW-102-07-F-D-Samtec-datasheet-97325576.pdf?src-supplier=Sager+Electronics, ComponentLink2Description=https://datasheet.octopart.com:443/TSW-102-07-F-D-Samtec-datasheet-151455181.pdf?src-supplier=Sager+Electronics, ComponentLink2URL=https://datasheet.octopart.com:443/TSW-102-07-F-D-Samtec-datasheet-151455181.pdf?src-supplier=Sager+Electronics, ComponentLink3Description=https://sigma.octopart.com:443/97325577/technical_drawing/Samtec-TSW-102-07-F-D.pdf?src-supplier=HQonline, ComponentLink3URL=https://sigma.octopart.com:443/97325577/technical_drawing/Samtec-TSW-102-07-F-D.pdf?src-supplier=HQonline, ComponentLink4Description=https://datasheet.octopart.com:443/TSW-102-07-F-D-Samtec-datasheet-62107121.pdf?src-supplier=Farnell, ComponentLink4URL=https://datasheet.octopart.com:443/TSW-102-07-F-D-Samtec-datasheet-62107121.pdf?src-supplier=Farnell, ComponentLink5Description=https://datasheet.octopart.com:443/TSW-102-07-F-D-Samtec-datasheet-136646178.pdf?src-supplier=Master+Electronics, ComponentLink5URL=https://datasheet.octopart.com:443/TSW-102-07-F-D-Samtec-datasheet-136646178.pdf?src-supplier=Master+Electronics, ComponentLink6Description=https://datasheet.octopart.com:443/TSW-102-07-F-D-Samtec-datasheet-118235302.pdf?src-supplier=Electro+Sonic, ComponentLink6URL=https://datasheet.octopart.com:443/TSW-102-07-F-D-Samtec-datasheet-118235302.pdf?src-supplier=Electro+Sonic, ComponentLink7Description=https://datasheet.octopart.com:443/TSW-102-07-F-D-Samtec-datasheet-180258786.pdf?src-supplier=JRH+Electronics, ComponentLink7URL=https://datasheet.octopart.com:443/TSW-102-07-F-D-Samtec-datasheet-180258786.pdf?src-supplier=JRH+Electronics, ComponentLink8Description=https://datasheet.octopart.com:443/TSW-102-07-F-D-Samtec-datasheet-160657603.pdf?src-supplier=Toby+Electronics, ComponentLink8URL=https://datasheet.octopart.com:443/TSW-102-07-F-D-Samtec-datasheet-160657603.pdf?src-supplier=Toby+Electronics, ComponentLink9Description=https://datasheet.octopart.com:443/TSW-102-07-F-D-Samtec-datasheet-116539033.pdf?src-supplier=Toby+Electronics, ComponentLink9URL=https://datasheet.octopart.com:443/TSW-102-07-F-D-Samtec-datasheet-116539033.pdf?src-supplier=Toby+Electronics, ComponentLink10Description=https://datasheet.octopart.com:443/TSW-102-07-F-D-Samtec-datasheet-116536310.pdf?src-supplier=Toby+Electronics, ComponentLink10URL=https://datasheet.octopart.com:443/TSW-102-07-F-D-Samtec-datasheet-116536310.pdf?src-supplier=Toby+Electronics, ComponentLink11Description=https://datasheet.octopart.com/TSW-102-07-F-D-Samtec-datasheet-86818365.pdf, ComponentLink11URL=https://datasheet.octopart.com/TSW-102-07-F-D-Samtec-datasheet-86818365.pdf, ComponentLink12Description=https://datasheet.octopart.com:443/TSW-102-07-F-D-Samtec-datasheet-11047283.pdf?src-supplier=Newark, ComponentLink12URL=https://datasheet.octopart.com:443/TSW-102-07-F-D-Samtec-datasheet-11047283.pdf?src-supplier=Newark, Connector Type="Male Pin", Contact Material=Bronze, Contact Mating Length=5.842mm, Contact Plating=Gold, Depth=5.08mm, Gender=Male, Housing Color=Black, Housing Material=Polyester, Lead Pitch=2.54mm, Length=5.08mm, Lifecycle Status=Production, Mounting Technology="Through Hole", Number of Contacts=4, Number of Positions=4, Number of Rows=2, Orientation=Straight, Pitch=2.54mm, Pricing="1=0.22, 50=0.19, 100=0.16, 500=0.14, 1000=0.11, 2000=0.1, 5000=0.09, 10000=0.08206 (USD)", Radiation Hardening=No, REACH SVHC=No, RoHS=Compliant, Row Spacing=2.54mm, Stock=11283, Supplier=DigiKey, Termination=Solder
J2 J4 J5 J6 J7 J9 J10: "Connector RF SMA Generic", Manufacturer="Cinch Connectivity Solutions Johnson", Manufacturer Part Number=142-0701-801, Maximum Frequency="18 GHz"
J3: "Connector RF SMP Generic", Manufacturer=Molex, Manufacturer Part Number=0853050232, Maximum Frequency="40 GHz"
J8: library part CONN_2x3_2.54mm_PinHeader_Vertical, "2x3 2.54mm Vertical Pin Header"
J11 J12: library part CONN_1x20_2.54mm_PinSocket_Vertical, "WR-PHD 2.54 mm Socket Header; 20 pins", Contact Resistance=20mΩ, Current Rating=3A, Insulation Resistance=1GΩ, Manufacturer="Wurth Elektronik", Manufacturer Part Number=61302011821, Max Operating Temperature=105°C, Min Operating Temperature=-40°C, Operating Supply Voltage=250V, Supplier Part Number=732-61302011821-ND, Category=Connectors, ComponentLink1Description=https://datasheet.octopart.com:443/61302011821-Wurth-Elektronik-datasheet-182028588.pdf?src-supplier=Wurth+Elektronik, ComponentLink1URL=https://datasheet.octopart.com:443/61302011821-Wurth-Elektronik-datasheet-182028588.pdf?src-supplier=Wurth+Elektronik, ComponentLink2Description=https://datasheet.octopart.com:443/61302011821-W%C3%BCrth-Elektronik-datasheet-62127820.pdf?src-supplier=Wurth+Elektronik, ComponentLink2URL=https://datasheet.octopart.com:443/61302011821-W%C3%BCrth-Elektronik-datasheet-62127820.pdf?src-supplier=Wurth+Elektronik, ComponentLink3Description=https://datasheet.octopart.com:443/61302011821-W%C3%BCrth-Elektronik-datasheet-149524182.pdf?src-supplier=Farnell, ComponentLink3URL=https://datasheet.octopart.com:443/61302011821-W%C3%BCrth-Elektronik-datasheet-149524182.pdf?src-supplier=Farnell, Contact Plating=Gold, Gender=Female, Insulation Material=PBT, Lead Pitch=2.54mm, Length=51.3mm, Orientation=Vertical, Pins=20, Pitch=2.54mm, Pricing="1=0.83, 25=0.7508, 100=0.7038, 250=0.6534, 500=0.6048, 1000=0.5058 (USD)", RoHS=Compliant, Stock=9205, Supplier=DigiKey
J13: library part CONN_2x6_2.54mm_PinHeader_Horizontal, "Conn Unshrouded Header HDR 12 POS 2.54mm Solder RA Top Entry Thru-Hole Bag", Contact Resistance=20mΩ, Current Rating=3A, Insulation Resistance=5GΩ, Manufacturer="Adam Tech", Manufacturer Part Number=PH2RA-12-UA, Max Operating Temperature=105°C, Min Operating Temperature=-40°C, Supplier Part Number=2057-PH2RA-12-UA-ND, Category="Card Edge Connectors", ComponentLink1Description=https://datasheet.octopart.com:443/PH2RA-12-UA-Adam-Tech-datasheet-21182894.pdf?src-supplier=IHS, ComponentLink1URL=https://datasheet.octopart.com:443/PH2RA-12-UA-Adam-Tech-datasheet-21182894.pdf?src-supplier=IHS, ComponentLink2Description=http://sigma.octopart.com:80/reach_statement/Adam-Tech-company-23.pdf?src-supplier=Compliance+Statements, ComponentLink2URL=http://sigma.octopart.com:80/reach_statement/Adam-Tech-company-23.pdf?src-supplier=Compliance+Statements, ComponentLink3Description=http://sigma.octopart.com:80/rohs_statement/Adam-Tech-company-22.pdf?src-supplier=Compliance+Statements, ComponentLink3URL=http://sigma.octopart.com:80/rohs_statement/Adam-Tech-company-22.pdf?src-supplier=Compliance+Statements, Contact Gender=Male, Contact Material=Brass, Export Control Classification Number (ECCN) Code=EAR99, Harmonized Tariff Schedule (HTS) Code=8536.69.40.40, Introduction Date=2012-01-13, Lifecycle Status=Production, Number of Rows=2, Pins=12, Pricing="1=0.27, 10=0.229, 100=0.1945, 500=0.17358, 1000=0.16528, 5000=0.14753, 10000=0.14049 (USD)", REACH SVHC=Yes, RoHS=Compliant, Row Spacing=2.54mm, Schedule B="8536694040, 8536694040|8536694040|8536694040|8536694040|8536694040", Stock=5214, Supplier=DigiKey, Terminal Pitch=2.54mm
J14: library part CONN_1x3_2.54mm_PinSocket_Vertical, "Btb Conn, Rcpt, 3Pos, 1Row, 2.54Mm Rohs Compliant: Yes", Contact Resistance=20mΩ, Current Rating=3A, Insulation Resistance=1GΩ, Manufacturer="Wurth Elektronik", Manufacturer Part Number=61300311821, Max Operating Temperature=105°C, Min Operating Temperature=-40°C, Operating Supply Voltage=250V, Supplier Part Number=732-61300311821-ND, Category=Uncategorized, ComponentLink1Description=https://datasheet.octopart.com:443/61300311821-Wurth-Elektronik-datasheet-182028583.pdf?src-supplier=Wurth+Elektronik, ComponentLink1URL=https://datasheet.octopart.com:443/61300311821-Wurth-Elektronik-datasheet-182028583.pdf?src-supplier=Wurth+Elektronik, ComponentLink2Description=https://datasheet.octopart.com:443/61300311821-W%C3%BCrth-Elektronik-datasheet-62127820.pdf?src-supplier=Wurth+Elektronik, ComponentLink2URL=https://datasheet.octopart.com:443/61300311821-W%C3%BCrth-Elektronik-datasheet-62127820.pdf?src-supplier=Wurth+Elektronik, Contact Plating=Gold, Gender=Female, Insulation Material=PBT, Lead Pitch=2.54mm, Length=8.12mm, Orientation=Vertical, Pins=3, Pitch=2.54mm, Pricing="1=0.32, 10=0.303, 100=0.2916, 250=0.27992, 500=0.2673 (USD)", RoHS=Compliant, Stock=1715, Supplier=DigiKey
J15: library part CONN_2x4_2.54mm_PinHeader_Vertical, "2x4 2.54mm Vertical Pin Header"
L1 L2 L3 L4: library part IND, "Inductor SMD Generic", Current Rating="750 mA", Manufacturer="Murata Electronics", Manufacturer Part Number=LQW15AN3N9B00D, Package Size=0402, Tolerance="+-0.1 nH", Core Material=Non-Magnetic
L5: library part IND, "Inductor SMD Generic", Package Size=0402
R1 R2 R3 R5 R7 R8 R9 R10 R11 R12 R13 R14 R15 R16 R17 R18 R20 R21 R22 R23 R24 R25 R26 R27 R29 R30 R34: library part RES, "Resistor SMD Generic", Package Size=0402
R4 R6 R28: library part RES, "Resistor SMD Generic", Package Size=0603
R19: library part RES, "Resistor SMD Generic", Package Size=0402, Tolerance=+-1%
R31: library part RES, "100Mw Thick Film Resistors 100Ppm/ 1% 2K 0603 Chip Resistor Surface Mount Rohs", Case Code (Imperial)=0603, Manufacturer=Yageo, Manufacturer Part Number=RC0603FR-072KL, Max Operating Temperature=155°C, Max Power Dissipation=100mW, Min Operating Temperature=-55°C, Supplier Part Number=311-2.00KHRCT-ND, Temperature Coefficient=100ppm/°C, Tolerance=1%, Voltage Rating=75V, Voltage Rating (DC)=50V, Case/Package=0603, Category="Chip SMD Resistors", China RoHS=Non-Compliant, ComponentLink1Description=https://datasheet.octopart.com:443/RC0603FR-072KL-Yageo-datasheet-175887523.pdf?src-supplier=Newark, ComponentLink1URL=https://datasheet.octopart.com:443/RC0603FR-072KL-Yageo-datasheet-175887523.pdf?src-supplier=Newark, ComponentLink2Description=https://datasheet.octopart.com:443/RC0603FR-072KL-Yageo-datasheet-103092701.pdf?src-supplier=Upverter, ComponentLink2URL=https://datasheet.octopart.com:443/RC0603FR-072KL-Yageo-datasheet-103092701.pdf?src-supplier=Upverter, ComponentLink3Description=https://datasheet.octopart.com:443/RC0603FR-072KL-Yageo-datasheet-8328172.pdf?src-supplier=element14+APAC, ComponentLink3URL=https://datasheet.octopart.com:443/RC0603FR-072KL-Yageo-datasheet-8328172.pdf?src-supplier=element14+APAC, ComponentLink4Description=https://datasheet.octopart.com:443/RC0603FR-072KL-Yageo-datasheet-34211833.pdf?src-supplier=element14+APAC, ComponentLink4URL=https://datasheet.octopart.com:443/RC0603FR-072KL-Yageo-datasheet-34211833.pdf?src-supplier=element14+APAC, ComponentLink5Description=https://datasheet.octopart.com:443/RC0603FR-072KL-Yageo-datasheet-62067350.pdf?src-supplier=Farnell, ComponentLink5URL=https://datasheet.octopart.com:443/RC0603FR-072KL-Yageo-datasheet-62067350.pdf?src-supplier=Farnell, ComponentLink6Description=https://datasheet.octopart.com:443/RC0603FR-072KL-Yageo-Group-datasheet-176638170.pdf?src-supplier=Future+Electronics, ComponentLink6URL=https://datasheet.octopart.com:443/RC0603FR-072KL-Yageo-Group-datasheet-176638170.pdf?src-supplier=Future+Electronics, ComponentLink7Description=https://datasheet.octopart.com:443/RC0603FR-072KL-Yageo-datasheet-164759695.pdf?src-supplier=Future+Electronics, ComponentLink7URL=https://datasheet.octopart.com:443/RC0603FR-072KL-Yageo-datasheet-164759695.pdf?src-supplier=Future+Electronics, ComponentLink8Description=https://datasheet.octopart.com:443/RC0603FR-072KL-Yageo-datasheet-137700087.pdf?src-supplier=Future+Electronics, ComponentLink8URL=https://datasheet.octopart.com:443/RC0603FR-072KL-Yageo-datasheet-137700087.pdf?src-supplier=Future+Electronics, ComponentLink9Description=https://datasheet.octopart.com:443/RC0603FR-072KL-Yageo-datasheet-27584510.pdf?src-supplier=Future+Electronics, ComponentLink9URL=https://datasheet.octopart.com:443/RC0603FR-072KL-Yageo-datasheet-27584510.pdf?src-supplier=Future+Electronics, ComponentLink10Description=https://datasheet.octopart.com:443/RC0603FR-072KL-Yageo-datasheet-15599030.pdf?src-supplier=Future+Electronics, ComponentLink10URL=https://datasheet.octopart.com:443/RC0603FR-072KL-Yageo-datasheet-15599030.pdf?src-supplier=Future+Electronics, ComponentLink11Description=https://datasheet.octopart.com:443/RC0603FR-072KL-Yageo-datasheet-12596169.pdf?src-supplier=Future+Electronics, ComponentLink11URL=https://datasheet.octopart.com:443/RC0603FR-072KL-Yageo-datasheet-12596169.pdf?src-supplier=Future+Electronics, ComponentLink12Description=https://datasheet.octopart.com:443/RC0603FR-072KL-Yageo-datasheet-8324193.pdf?src-supplier=Future+Electronics, ComponentLink12URL=https://datasheet.octopart.com:443/RC0603FR-072KL-Yageo-datasheet-8324193.pdf?src-supplier=Future+Electronics, ComponentLink13Description=https://datasheet.octopart.com/RC0603FR-072KL-Yageo-datasheet-73766026.pdf, ComponentLink13URL=https://datasheet.octopart.com/RC0603FR-072KL-Yageo-datasheet-73766026.pdf, ComponentLink14Description=https://datasheet.octopart.com:443/RC0603FR-072KL-Yageo-datasheet-118562.pdf?src-supplier=DigiKey, ComponentLink14URL=https://datasheet.octopart.com:443/RC0603FR-072KL-Yageo-datasheet-118562.pdf?src-supplier=DigiKey, ComponentLink15Description=https://datasheet.octopart.com:443/RC0603FR-072KL-Yageo-datasheet-14181487.pdf?src-supplier=iiiC, ComponentLink15URL=https://datasheet.octopart.com:443/RC0603FR-072KL-Yageo-datasheet-14181487.pdf?src-supplier=iiiC, ComponentLink16Description=http://sigma.octopart.com:80/conflict_mineral_statement/Yageo-company-3.pdf?src-supplier=Compliance+Statements, ComponentLink16URL=http://sigma.octopart.com:80/conflict_mineral_statement/Yageo-company-3.pdf?src-supplier=Compliance+Statements, ComponentLink17Description=http://sigma.octopart.com:80/rohs_statement/Yageo-company-2.pdf?src-supplier=Compliance+Statements, ComponentLink17URL=http://sigma.octopart.com:80/rohs_statement/Yageo-company-2.pdf?src-supplier=Compliance+Statements, Composition="Thick Film", Country of Origin="Mainland China, Taiwan", Depth=800µm, Export Control Classification Number (ECCN) Code=EAR99, Features="Moisture Resistant", Harmonized Tariff Schedule (HTS) Code=8533.21.00.30, Height=450µm, Introduction Date=2004-10-04, Lead Free="Lead Free", Length=1.6mm, Lifecycle Status=Production, Military Standard=Not, Mounting Technology="Surface Mount", Number of Terminals=2, Number of Terminations=2, Package Size=0603, Packaging="Tape & Reel", Pins=2, Power Dissipation=100mW, Pricing="1=0.1, 10=0.007, 25=0.0068, 50=0.0056 (USD)", REACH SVHC=Yes, RoHS=Compliant, Schedule B="8533210045, 8533210045|8533210045, 8533210045|8533210045|8533210045, 8533210045|8533210045|8533210045|8533210045", Stock=1454971, Supplier=DigiKey, Termination=SMD/SMT, Width=800µm, Working Voltage=75V
R32: library part RES, "100mW Thick Film Resistors 75V ±100ppm/℃ ±1% 1kΩ 0603 Chip Resistor - Surface Mount ROHS", Case Code (Imperial)=0603, Manufacturer=Yageo, Manufacturer Part Number=RC0603FR-071KL, Max Operating Temperature=155°C, Min Operating Temperature=-55°C, Power Dissipation=100mW, Supplier Part Number=311-1.00KHRCT-ND, Temperature Coefficient=100ppm/°C, Tolerance=1%, Voltage Rating=50V, Working Voltage=75V, Case Code (Metric)=0603, Case/Package=0603, Category="Chip SMD Resistors", China RoHS=Non-Compliant, ComponentLink1Description=https://datasheet.octopart.com:443/RC0603FR-071KL-Yageo-datasheet-175887523.pdf?src-supplier=Newark, ComponentLink1URL=https://datasheet.octopart.com:443/RC0603FR-071KL-Yageo-datasheet-175887523.pdf?src-supplier=Newark, ComponentLink2Description=https://datasheet.octopart.com:443/RC0603FR-071KL-Yageo-datasheet-34211833.pdf?src-supplier=Newark, ComponentLink2URL=https://datasheet.octopart.com:443/RC0603FR-071KL-Yageo-datasheet-34211833.pdf?src-supplier=Newark, ComponentLink3Description=https://datasheet.octopart.com:443/RC0603FR-071KL-Yageo-datasheet-12596169.pdf?src-supplier=Newark, ComponentLink3URL=https://datasheet.octopart.com:443/RC0603FR-071KL-Yageo-datasheet-12596169.pdf?src-supplier=Newark, ComponentLink4Description=https://datasheet.octopart.com:443/RC0603FR-071KL-Yageo-datasheet-499455.pdf?src-supplier=Newark, ComponentLink4URL=https://datasheet.octopart.com:443/RC0603FR-071KL-Yageo-datasheet-499455.pdf?src-supplier=Newark, ComponentLink5Description=https://datasheet.octopart.com:443/RC0603FR-071KL-Yageo-datasheet-503470.pdf?src-supplier=Newark, ComponentLink5URL=https://datasheet.octopart.com:443/RC0603FR-071KL-Yageo-datasheet-503470.pdf?src-supplier=Newark, ComponentLink6Description=https://datasheet.octopart.com:443/RC0603FR-071KL-Yageo-datasheet-62067350.pdf?src-supplier=element14+APAC, ComponentLink6URL=https://datasheet.octopart.com:443/RC0603FR-071KL-Yageo-datasheet-62067350.pdf?src-supplier=element14+APAC, ComponentLink7Description=https://datasheet.octopart.com:443/RC0603FR-071KL-Yageo-datasheet-21426514.pdf?src-supplier=element14+APAC, ComponentLink7URL=https://datasheet.octopart.com:443/RC0603FR-071KL-Yageo-datasheet-21426514.pdf?src-supplier=element14+APAC, ComponentLink8Description=https://datasheet.octopart.com:443/RC0603FR-071KL-Yageo-datasheet-141265859.pdf?src-supplier=Upverter, ComponentLink8URL=https://datasheet.octopart.com:443/RC0603FR-071KL-Yageo-datasheet-141265859.pdf?src-supplier=Upverter, ComponentLink9Description=https://datasheet.octopart.com:443/RC0603FR-071KL-Yageo-datasheet-103092701.pdf?src-supplier=Upverter, ComponentLink9URL=https://datasheet.octopart.com:443/RC0603FR-071KL-Yageo-datasheet-103092701.pdf?src-supplier=Upverter, ComponentLink10Description=https://sigma.octopart.com:443/138820526/technical_drawing/Yageo-RC0603FR-071KL.pdf?src-supplier=Upverter, ComponentLink10URL=https://sigma.octopart.com:443/138820526/technical_drawing/Yageo-RC0603FR-071KL.pdf?src-supplier=Upverter, ComponentLink11Description=https://datasheet.octopart.com:443/RC0603FR-071KL-Yageo-datasheet-68297981.pdf?src-supplier=Upverter, ComponentLink11URL=https://datasheet.octopart.com:443/RC0603FR-071KL-Yageo-datasheet-68297981.pdf?src-supplier=Upverter, ComponentLink12Description=https://datasheet.octopart.com:443/RC0603FR-071KL-Yageo-datasheet-8328172.pdf?src-supplier=Farnell, ComponentLink12URL=https://datasheet.octopart.com:443/RC0603FR-071KL-Yageo-datasheet-8328172.pdf?src-supplier=Farnell, ComponentLink13Description=https://datasheet.octopart.com:443/RC0603FR-071KL-Yageo-datasheet-13691069.pdf?src-supplier=Farnell, ComponentLink13URL=https://datasheet.octopart.com:443/RC0603FR-071KL-Yageo-datasheet-13691069.pdf?src-supplier=Farnell, ComponentLink14Description=https://datasheet.octopart.com:443/RC0603FR-071KL-Yageo-datasheet-15599030.pdf?src-supplier=Seeed+Studio, ComponentLink14URL=https://datasheet.octopart.com:443/RC0603FR-071KL-Yageo-datasheet-15599030.pdf?src-supplier=Seeed+Studio, ComponentLink15Description=https://datasheet.octopart.com:443/RC0603FR-071KL-Yageo-Group-datasheet-176638170.pdf?src-supplier=Future+Electronics, ComponentLink15URL=https://datasheet.octopart.com:443/RC0603FR-071KL-Yageo-Group-datasheet-176638170.pdf?src-supplier=Future+Electronics, ComponentLink16Description=https://datasheet.octopart.com:443/RC0603FR-071KL-Yageo-datasheet-164759695.pdf?src-supplier=Future+Electronics, ComponentLink16URL=https://datasheet.octopart.com:443/RC0603FR-071KL-Yageo-datasheet-164759695.pdf?src-supplier=Future+Electronics, ComponentLink17Description=https://datasheet.octopart.com:443/RC0603FR-071KL-Yageo-datasheet-137700087.pdf?src-supplier=Future+Electronics, ComponentLink17URL=https://datasheet.octopart.com:443/RC0603FR-071KL-Yageo-datasheet-137700087.pdf?src-supplier=Future+Electronics, ComponentLink18Description=https://datasheet.octopart.com:443/RC0603FR071KL-Yageo-datasheet-27584510.pdf?src-supplier=Future+Electronics, ComponentLink18URL=https://datasheet.octopart.com:443/RC0603FR071KL-Yageo-datasheet-27584510.pdf?src-supplier=Future+Electronics, ComponentLink19Description=https://datasheet.octopart.com:443/RC0603FR-071KL-Yageo-datasheet-8324193.pdf?src-supplier=Future+Electronics, ComponentLink19URL=https://datasheet.octopart.com:443/RC0603FR-071KL-Yageo-datasheet-8324193.pdf?src-supplier=Future+Electronics, ComponentLink20Description=https://datasheet.octopart.com:443/RC0603FR-071KL-Yageo-datasheet-79472498.pdf?src-supplier=Megastar, ComponentLink20URL=https://datasheet.octopart.com:443/RC0603FR-071KL-Yageo-datasheet-79472498.pdf?src-supplier=Megastar, ComponentLink21Description=https://datasheet.octopart.com/RC0603FR-071KL-Yageo-datasheet-73766026.pdf, ComponentLink21URL=https://datasheet.octopart.com/RC0603FR-071KL-Yageo-datasheet-73766026.pdf, ComponentLink22Description=https://datasheet.octopart.com:443/RC0603FR-071KL-Yageo-datasheet-118562.pdf?src-supplier=DigiKey, ComponentLink22URL=https://datasheet.octopart.com:443/RC0603FR-071KL-Yageo-datasheet-118562.pdf?src-supplier=DigiKey, ComponentLink23Description=http://sigma.octopart.com:80/conflict_mineral_statement/Yageo-company-3.pdf?src-supplier=Compliance+Statements, ComponentLink23URL=http://sigma.octopart.com:80/conflict_mineral_statement/Yageo-company-3.pdf?src-supplier=Compliance+Statements, ComponentLink24Description=http://sigma.octopart.com:80/rohs_statement/Yageo-company-2.pdf?src-supplier=Compliance+Statements, ComponentLink24URL=http://sigma.octopart.com:80/rohs_statement/Yageo-company-2.pdf?src-supplier=Compliance+Statements, Composition="Thick Film", Contact Plating=Tin, Country of Origin="Mainland China, Taiwan", Depth=800µm, Export Control Classification Number (ECCN) Code=EAR99, Harmonized Tariff Schedule (HTS) Code=8533.21.00.30, Height=450µm, Introduction Date=2004-10-04, Lead Free="Lead Free", Length=1.6mm, Lifecycle Status=Production, Military Standard=Not, Mounting Technology="Surface Mount", Number of Terminals=2, Package Size=0603, Packaging="Tape and Reel", Pins=2, Pricing="1=0.1, 10=0.008, 25=0.0076, 50=0.0072, 100=0.0061, 250=0.00568, 1000=0.00569, 5000=0.00204 (USD)", Radiation Hardening=No, REACH SVHC=Yes, RoHS=Compliant, Schedule B="8533210045, 8533210045|8533210045|8533210045|8533210045|8533210045|8533210045|8533210045|8533210045|8533210045|8533210045|8533210045|8533210045|8533210045|8533210045|8533210045|8533210045|8533210045|8533210045|8533210045|8533210045|8533210045|8533210045|8533210045|85", Stock=5944272, Supplier=DigiKey, Termination=SMD/SMT, Voltage Rating (DC)=50V, Width=800µm
R33: library part RES, "Res Thick Film 0603 178 Ohm 1% 0.1W(1/10W) ±100ppm/C Pad SMD T/R", Case Code (Imperial)=0603, Manufacturer=Yageo, Manufacturer Part Number=RC0603FR-07178RL, Max Operating Temperature=155°C, Min Operating Temperature=-55°C, Power Dissipation=100mW, Supplier Part Number=311-178HRCT-ND, Temperature Coefficient=100ppm/°C, Tolerance=1%, Voltage Rating=75V, Voltage Rating (DC)=50V, Case/Package=0603, Category="Chip SMD Resistors", China RoHS=Non-Compliant, ComponentLink1Description=https://datasheet.octopart.com:443/RC0603FR-07178RL-Yageo-datasheet-175887523.pdf?src-supplier=Newark, ComponentLink1URL=https://datasheet.octopart.com:443/RC0603FR-07178RL-Yageo-datasheet-175887523.pdf?src-supplier=Newark, ComponentLink2Description=https://datasheet.octopart.com:443/RC0603FR-07178RL-Yageo-datasheet-103092701.pdf?src-supplier=Upverter, ComponentLink2URL=https://datasheet.octopart.com:443/RC0603FR-07178RL-Yageo-datasheet-103092701.pdf?src-supplier=Upverter, ComponentLink3Description=https://datasheet.octopart.com:443/RC0603FR-07178RL-Yageo-Group-datasheet-176638170.pdf?src-supplier=Future+Electronics, ComponentLink3URL=https://datasheet.octopart.com:443/RC0603FR-07178RL-Yageo-Group-datasheet-176638170.pdf?src-supplier=Future+Electronics, ComponentLink4Description=https://datasheet.octopart.com:443/RC0603FR-07178RL-Yageo-datasheet-164759695.pdf?src-supplier=Future+Electronics, ComponentLink4URL=https://datasheet.octopart.com:443/RC0603FR-07178RL-Yageo-datasheet-164759695.pdf?src-supplier=Future+Electronics, ComponentLink5Description=https://datasheet.octopart.com:443/RC0603FR-07178RL-Yageo-datasheet-137700087.pdf?src-supplier=Future+Electronics, ComponentLink5URL=https://datasheet.octopart.com:443/RC0603FR-07178RL-Yageo-datasheet-137700087.pdf?src-supplier=Future+Electronics, ComponentLink6Description=https://datasheet.octopart.com:443/RC0603FR-07178RL-Yageo-datasheet-101672632.pdf?src-supplier=Future+Electronics, ComponentLink6URL=https://datasheet.octopart.com:443/RC0603FR-07178RL-Yageo-datasheet-101672632.pdf?src-supplier=Future+Electronics, ComponentLink7Description=https://datasheet.octopart.com:443/RC0603FR-07178RL-Yageo-datasheet-15599030.pdf?src-supplier=Future+Electronics, ComponentLink7URL=https://datasheet.octopart.com:443/RC0603FR-07178RL-Yageo-datasheet-15599030.pdf?src-supplier=Future+Electronics, ComponentLink8Description=https://datasheet.octopart.com:443/RC0603FR-07178RL-Yageo-datasheet-12596169.pdf?src-supplier=Future+Electronics, ComponentLink8URL=https://datasheet.octopart.com:443/RC0603FR-07178RL-Yageo-datasheet-12596169.pdf?src-supplier=Future+Electronics, ComponentLink9Description=https://datasheet.octopart.com:443/RC0603FR-07178RL-Yageo-datasheet-8328172.pdf?src-supplier=Future+Electronics, ComponentLink9URL=https://datasheet.octopart.com:443/RC0603FR-07178RL-Yageo-datasheet-8328172.pdf?src-supplier=Future+Electronics, ComponentLink10Description=https://datasheet.octopart.com:443/RC0603FR-07178RL-Yageo-datasheet-148775077.pdf?src-supplier=TME, ComponentLink10URL=https://datasheet.octopart.com:443/RC0603FR-07178RL-Yageo-datasheet-148775077.pdf?src-supplier=TME, ComponentLink11Description=https://datasheet.octopart.com/RC0603FR-07178RL-Yageo-datasheet-73766026.pdf, ComponentLink11URL=https://datasheet.octopart.com/RC0603FR-07178RL-Yageo-datasheet-73766026.pdf, ComponentLink12Description=https://datasheet.octopart.com:443/RC0603FR-07178RL-Yageo-datasheet-118562.pdf?src-supplier=DigiKey, ComponentLink12URL=https://datasheet.octopart.com:443/RC0603FR-07178RL-Yageo-datasheet-118562.pdf?src-supplier=DigiKey, ComponentLink13Description=http://sigma.octopart.com:80/conflict_mineral_statement/Yageo-company-3.pdf?src-supplier=Compliance+Statements, ComponentLink13URL=http://sigma.octopart.com:80/conflict_mineral_statement/Yageo-company-3.pdf?src-supplier=Compliance+Statements, ComponentLink14Description=http://sigma.octopart.com:80/rohs_statement/Yageo-company-2.pdf?src-supplier=Compliance+Statements, ComponentLink14URL=http://sigma.octopart.com:80/rohs_statement/Yageo-company-2.pdf?src-supplier=Compliance+Statements, Composition="Thick Film", Depth=800µm, Height=450µm, Lead Free="Lead Free", Length=1.6mm, Lifecycle Status=Production, Military Standard=Not, Mounting Technology="Surface Mount", Number of Terminals=2, Package Size=0603, Packaging="Tape & Reel", Pricing="1=0.1, 10=0.006, 25=0.0056, 50=0.0052 (USD)", REACH SVHC=Yes, RoHS=Compliant, Schedule B="8533210045, 8533210045|8533210045|8533210045|8533210045|8533210045", Stock=269039, Supplier=DigiKey, Termination=SMD/SMT, Width=800µm, Working Voltage=75V